# Altium PCB AT606IO_VB1.PcbDoc (part 2 of 2)
Units mm, origin at the board's own origin, x right, y up, seen from the top; angles counter-clockwise.
Board outline 66.03 x 73.03 mm, 2 copper layers (TOP, BOTTOM), stack 0.264 mm thick; 2 components, 10 nets, 12 pads, 245 vias.
Unrouted connection lines stored in the file: 2.
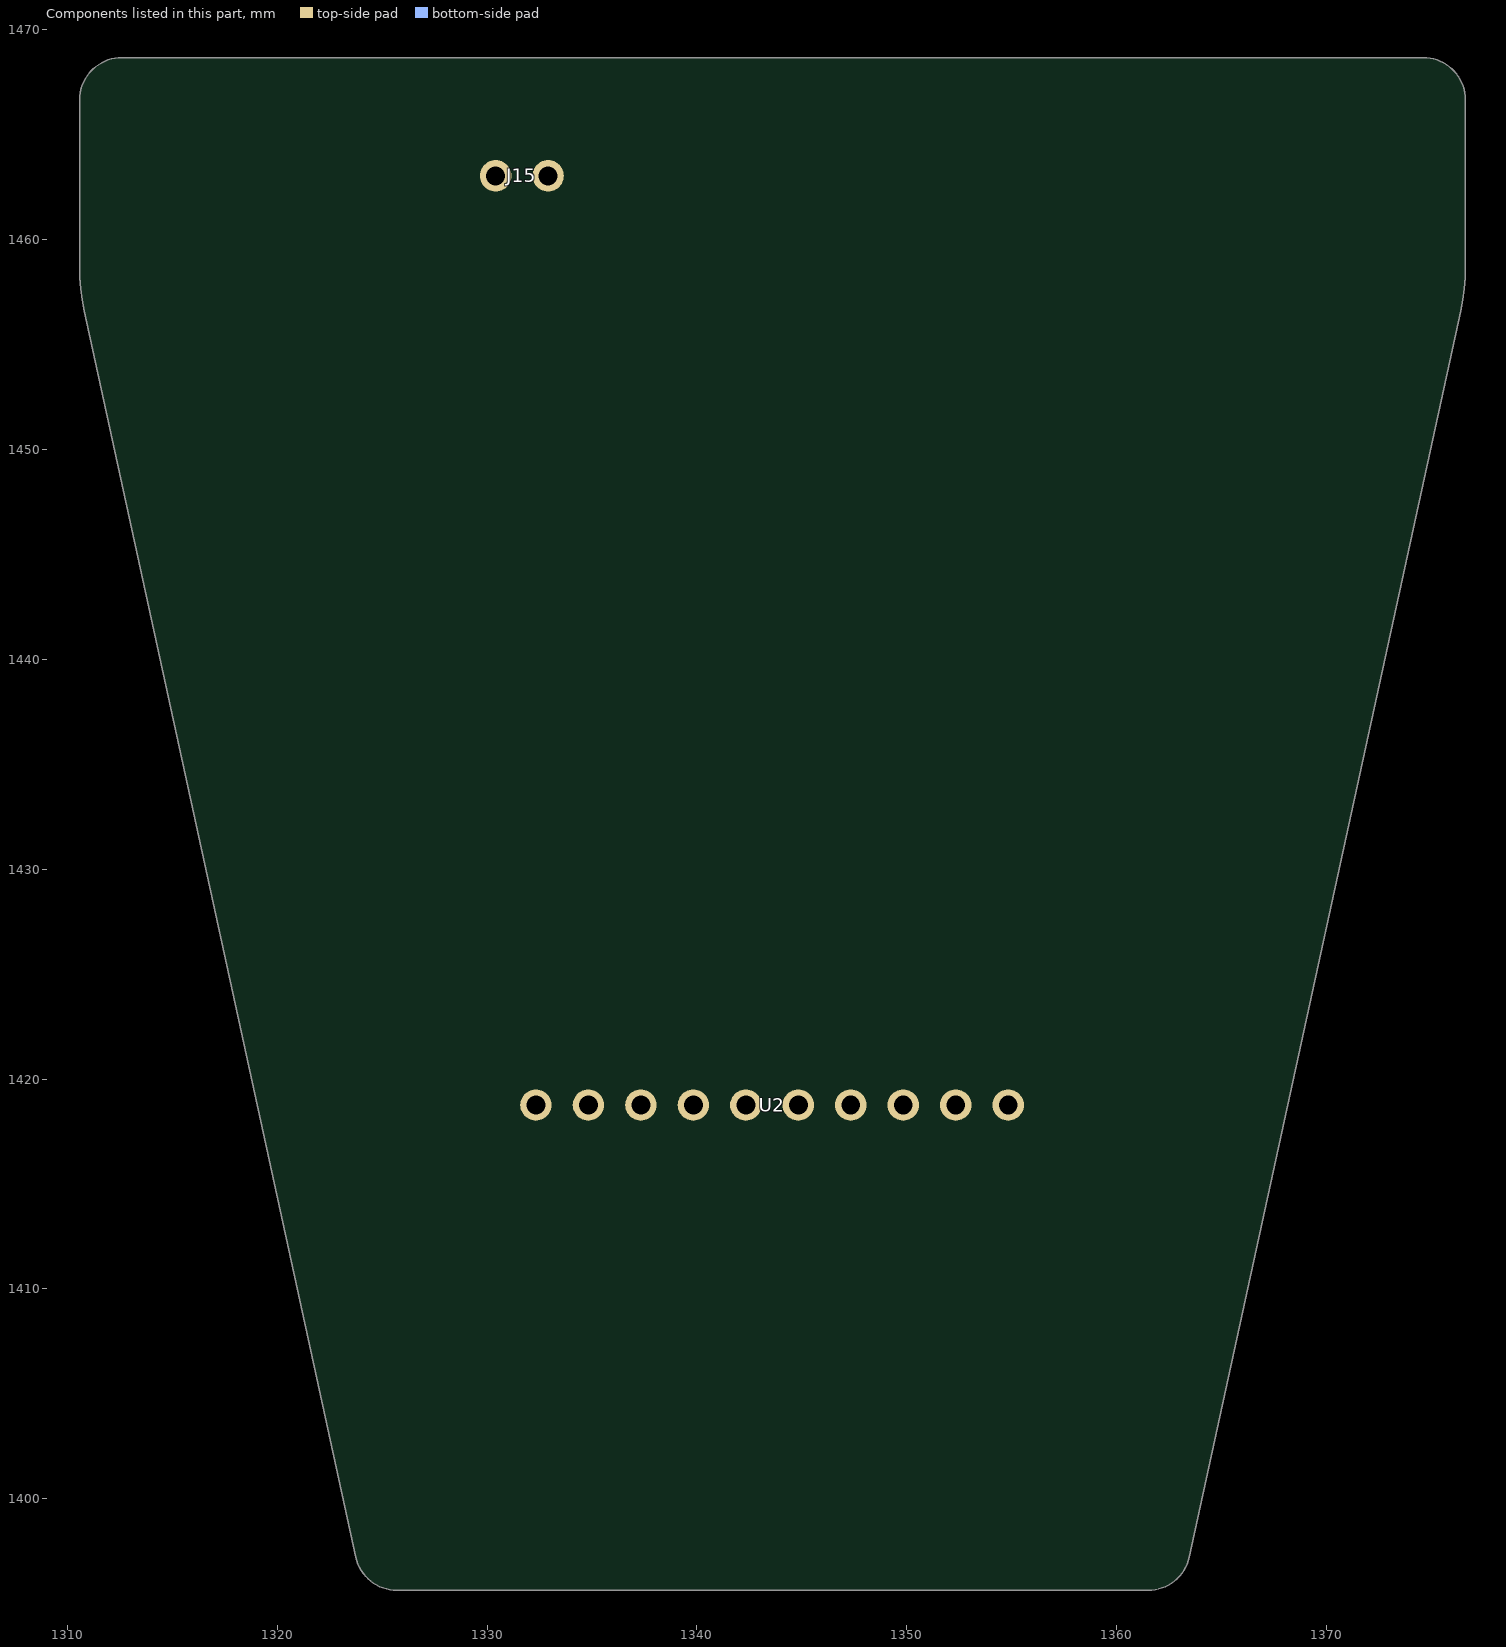
[diagram p2: the components of this part, seen from the top]

## Silkscreen, mask and mechanical layers (free items; w line width, h text height) (continued)
DXF_321B:
  circle w0.025: c1364.379,1419.965 r0.85
  circle w0.025: c1364.379,1413.965 r0.85
  circle w0.025: c1339.179,1413.965 r0.85
  circle w0.025: c1339.179,1422.965 r0.85
  circle w0.025: c1368.929,1414.352 r1.1
  circle w0.025: c1299.929,1414.352 r1.1
  lines w0.025: 1302.429,1411.052 1302.429,1425.052 ; 1314.879,1425.052 1314.879,1419.052 1319.879,1419.052 1319.879,1425.052 ; 1331.429,1411.052 1331.429,1425.052 ; 1336.429,1411.052 1336.429,1425.052 ; 1349.279,1411.052 1349.279,1425.052 ; 1354.279,1411.052 1354.279,1425.052 ; 1366.429,1411.052 1366.429,1425.052 ; 1294.429,1412.052 ccw(c1295.429,1412.052) 1295.429,1411.052 1373.429,1411.052 ccw(c1373.429,1412.052) 1374.429,1412.052 1374.429,1424.052 ccw(c1373.429,1424.052) 1373.429,1425.052 1295.429,1425.052 ccw(c1295.429,1424.052) 1294.429,1424.052 1294.429,1412.052 ; 1310.329,1413.102 1324.129,1413.102 1324.129,1414.202 1323.579,1414.202 1323.579,1415.702 1323.464,1415.702 1323.464,1415.302 1322.994,1415.302 1322.994,1415.702 1322.864,1415.702 1322.864,1415.302 1322.394,1415.302 1322.394,1415.702 1322.264,1415.702 1322.264,1415.302 1321.794,1415.302 1321.794,1415.702 1321.664,1415.702 1321.664,1415.302 1321.194,1415.302 1321.194,1415.702 1321.064,1415.702 1321.064,1415.302 1320.594,1415.302 1320.594,1415.702 1320.464,1415.702 1320.464,1415.302 1319.994,1415.302 1319.994,1415.702 1319.864,1415.702 1319.864,1415.302 1319.394,1415.302 1319.394,1415.702 1319.264,1415.702 1319.264,1415.302 1318.794,1415.302 1318.794,1415.702 1318.664,1415.702 1318.664,1415.302 1318.194,1415.302 1318.194,1415.702 1318.064,1415.702 1318.064,1415.302 1317.939,1415.302 1317.939,1414.816 1317.819,1414.816 1317.819,1415.302 1317.594,1415.302 1317.594,1415.702 1317.464,1415.702 1317.464,1415.302 1316.994,1415.302 1316.994,1415.702 1316.864,1415.702 1316.864,1415.302 1316.639,1415.302 1316.639,1414.816 1316.519,1414.816 1316.519,1415.302 1316.394,1415.302 1316.394,1415.702 1316.264,1415.702 1316.264,1415.302 1315.794,1415.302 1315.794,1415.702 1315.664,1415.702 1315.664,1415.302 1315.194,1415.302 1315.194,1415.702 1315.064,1415.702 1315.064,1415.302 1314.594,1415.302 1314.594,1415.702 1314.464,1415.702 1314.464,1415.302 1313.994,1415.302 1313.994,1415.702 1313.864,1415.702 1313.864,1415.302 1313.394,1415.302 1313.394,1415.702 1313.264,1415.702 1313.264,1415.302 1312.794,1415.302 1312.794,1415.702 1312.664,1415.702 1312.664,1415.302 1312.194,1415.302 1312.194,1415.702 1312.064,1415.702 1312.064,1415.302 1311.594,1415.302 1311.594,1415.702 1311.464,1415.702 1311.464,1415.302 1310.994,1415.302 1310.994,1415.702 1310.879,1415.702 1310.879,1414.202 1310.329,1414.202 1310.329,1413.102
DXF_321_TOP:
  drawing of 260 lines, arcs and shapes, not listed
TOP_NEW:
  circle w0.025: c1339.179,1413.961 r0.85
  circle w0.025: c1364.379,1413.961 r0.85
  circle w0.025: c1364.379,1419.961 r0.85
  circle w0.025: c1339.179,1422.961 r0.85
  circle w0.025: c1299.929,1414.348 r1.1
  circle w0.025: c1368.929,1414.348 r1.1
  circle w0.025: c1326.879,1416.748 r2.05
  circle w0.025: c1307.879,1416.748 r2.05
  circle w0.025: c1339.179,1413.961 r0.85
  circle w0.025: c1364.379,1413.961 r0.85
  circle w0.025: c1364.379,1419.961 r0.85
  circle w0.025: c1339.179,1422.961 r0.85
  circle w0.025: c1299.929,1414.348 r1.1
  circle w0.025: c1368.929,1414.348 r1.1
  circle w0.025: c1326.879,1416.748 r2.05
  circle w0.025: c1307.879,1416.748 r2.05
  lines w0.025: 1294.429,1412.048 ccw(c1295.429,1412.048) 1295.429,1411.048 ; 1294.429,1412.048 ccw(c1295.429,1412.048) 1295.429,1411.048 ; 1294.429,1412.048 1294.429,1424.048 ; 1294.429,1412.048 1294.429,1424.048 ; 1294.429,1424.048 cw(c1295.429,1424.048) 1295.429,1425.048 ; 1294.429,1424.048 cw(c1295.429,1424.048) 1295.429,1425.048 ; 1295.429,1411.048 1373.429,1411.048 ; 1295.429,1411.048 1373.429,1411.048 ; 1295.429,1425.048 1373.429,1425.048 ; 1295.429,1425.048 1373.429,1425.048 ; 1337.179,1412.961 1337.179,1423.961 ; 1337.179,1412.961 1366.379,1412.961 ; 1337.179,1412.961 1337.179,1423.961 ; 1337.179,1412.961 1366.379,1412.961 ; 1337.179,1423.961 1344.179,1423.961 ; 1337.179,1423.961 1344.179,1423.961 ; 1342.379,1414.161 1342.379,1419.761 ; 1342.379,1414.161 1347.129,1414.161 ; 1342.379,1414.161 1342.379,1419.761 ; 1342.379,1414.161 1347.129,1414.161 ; 1342.379,1419.761 1347.129,1419.761 ; 1342.379,1419.761 1347.129,1419.761 ; 1342.929,1414.713 1342.929,1419.21 ; 1342.929,1414.713 1344.629,1414.713 ; 1342.929,1414.713 1342.929,1419.21 ; 1342.929,1414.713 1344.629,1414.713 ; 1342.929,1419.21 1344.629,1419.21 ; 1342.929,1419.21 1344.629,1419.21 ; 1344.179,1420.961 1344.179,1423.961 ; 1344.179,1420.961 1366.379,1420.961 ; 1344.179,1420.961 1344.179,1423.961 ; 1344.179,1420.961 1366.379,1420.961 ; 1344.629,1414.713 1344.629,1419.21 ; 1344.629,1414.713 1344.629,1419.21 ; 1347.129,1414.161 1347.129,1419.761 ; 1347.129,1414.161 1347.129,1419.761 ; 1348.429,1414.161 1348.429,1419.761 ; 1348.429,1414.161 1355.129,1414.161 ; 1348.429,1414.161 1348.429,1419.761 ; 1348.429,1414.161 1355.129,1414.161 ; 1348.429,1419.761 1355.129,1419.761 ; 1348.429,1419.761 1355.129,1419.761 ; 1350.929,1414.713 1350.929,1419.21 ; 1350.929,1414.713 1352.629,1414.713 ; 1350.929,1414.713 1350.929,1419.21 ; 1350.929,1414.713 1352.629,1414.713 ; 1350.929,1419.21 1352.629,1419.21 ; 1350.929,1419.21 1352.629,1419.21 ; 1352.629,1414.713 1352.629,1419.21 ; 1352.629,1414.713 1352.629,1419.21 ; 1355.129,1414.161 1355.129,1419.761 ; 1355.129,1414.161 1355.129,1419.761 ; 1356.429,1414.161 1356.429,1419.761 ; 1356.429,1414.161 1361.179,1414.161 ; 1356.429,1414.161 1356.429,1419.761 ; 1356.429,1414.161 1361.179,1414.161 ; 1356.429,1419.761 1361.179,1419.761 ; 1356.429,1419.761 1361.179,1419.761 ; 1358.929,1414.713 1358.929,1419.21 ; 1358.929,1414.713 1360.629,1414.713 ; 1358.929,1414.713 1358.929,1419.21 ; 1358.929,1414.713 1360.629,1414.713 ; 1358.929,1419.21 1360.629,1419.21 ; 1358.929,1419.21 1360.629,1419.21 ; 1360.629,1414.713 1360.629,1419.21 ; 1360.629,1414.713 1360.629,1419.21 ; 1361.179,1414.161 1361.179,1419.761 ; 1361.179,1414.161 1361.179,1419.761 ; 1366.379,1412.961 1366.379,1420.961 ; 1366.379,1412.961 1366.379,1420.961 ; 1373.429,1411.048 ccw(c1373.429,1412.048) 1374.429,1412.048 ; 1373.429,1411.048 ccw(c1373.429,1412.048) 1374.429,1412.048 ; 1373.429,1425.048 cw(c1373.429,1424.048) 1374.429,1424.048 ; 1373.429,1425.048 cw(c1373.429,1424.048) 1374.429,1424.048 ; 1374.429,1412.048 1374.429,1424.048 ; 1374.429,1412.048 1374.429,1424.048 ; 1297.429,1411.048 1297.429,1425.048 1297.429,1411.048 ; 1331.429,1411.048 1331.429,1425.048 1331.429,1411.048 ; 1336.429,1411.048 1336.429,1425.048 1336.429,1411.048 ; 1363.529,1419.961 ccw(c1364.379,1419.961) 1363.747,1419.392 cw(c1364.379,1419.961) 1363.529,1419.961 ; 1367.829,1414.348 ccw(c1368.929,1414.348) 1367.953,1413.84 cw(c1368.929,1414.348) 1367.829,1414.348 ; 1371.429,1411.048 1371.429,1425.048 1371.429,1411.048
TOPNEW:
  drawing of 175 lines, arcs and shapes, not listed
DXF_320:
  drawing of 201 lines, arcs and shapes, not listed
DRAWING_ORIGIN:
  lines w0.025: 1283.764,1341.524 1284.164,1341.524 ; 1283.964,1341.324 1283.964,1341.724

## Text inside footprints (layer, text, board x,y; h text height)
J15: PIN_NUMBER "1" at 1332.656,1463.038 h0.64 r180; PIN_NUMBER "2" at 1330.156,1463.038 h0.64 r180
U2: PIN_NUMBER "1" at 1355.592,1418.766 h0.64 r180; PIN_NUMBER "8" at 1338.092,1418.766 h0.64 r180; PIN_NUMBER "7" at 1340.592,1418.766 h0.64 r180; PIN_NUMBER "6" at 1343.092,1418.766 h0.64 r180; PIN_NUMBER "5" at 1345.592,1418.766 h0.64 r180; PIN_NUMBER "4" at 1348.092,1418.766 h0.64 r180; PIN_NUMBER "3" at 1350.592,1418.766 h0.64 r180; PIN_NUMBER "2" at 1353.092,1418.766 h0.64 r180; PIN_NUMBER "9" at 1335.592,1418.766 h0.64 r180; PIN_NUMBER "10" at 1332.584,1418.766 h0.64 r180